# EAGLE board 2DROPLETS.V1_LPG(eurorack) (EAGLE 9.6.2)
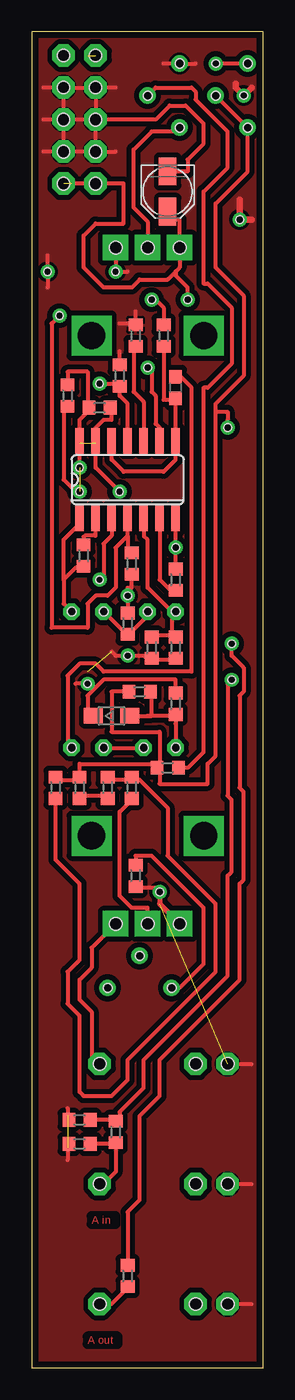
[diagram p0: board, top side]
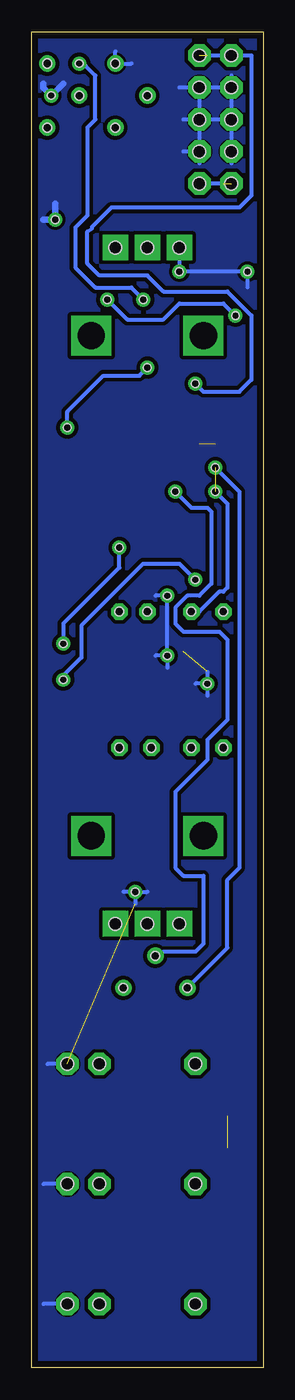
[diagram p1: board, bottom side, seen from below]

Size 18.39 x 106.05 mm. Coordinates in mm from the lower left corner, seen from the top.
Outline: 0,0 18.39,0 18.39,106.04 0,106.04 0,0
Copper layers (1*16): Top 0.035mm / dielectric 1.5mm / Bottom 0.035mm
Design rules "PCBCart-Standard *": minimum track width 8mil, minimum drill 0.4mm, track to track 8mil, track to pad 8mil, pad to pad 8mil, via to via 8mil, smd to smd 8mil, copper to edge 20mil, drill to drill 8mil, minimum pad ring 8mil, minimum via ring 10mil, stop-mask expansion 3mil, vias tented up to drill 25mil, thermal gap 8mil
Holes 0.7 mm at 11.75,103.51 9.21,100.97 11.75,98.43 17.14,98.43 14.61,100.97 17.14,103.51 3.18,60.01 5.71,60.01 9.21,60.01 11.43,60.01 3.18,49.21 5.71,49.21 8.89,49.21 11.43,49.21 6.03,30.16 8.57,32.7 11.11,30.16
Holes 1 mm at 5.4,5.08 15.56,5.08 13.02,5.08 13.02,14.6 15.56,14.6 15.56,24.13 13.02,24.13 5.4,24.13 5.4,14.6 9.21,35.24 6.67,35.24 11.75,35.24 6.67,88.9 9.21,88.9 11.75,88.9 2.54,104.14 2.54,101.6 2.54,99.06 2.54,96.52 2.54,93.98 5.08,93.98 5.08,96.52 5.08,99.06 5.08,101.6 5.08,104.14
Holes 0.6 mm at 4.45,54.29 7.62,56.52 11.43,65.09 15.88,57.47 15.88,54.61 5.4,62.55 7.62,61.28 2.22,83.5 12.38,84.77 5.4,78.11 9.21,79.38 15.56,74.61 1.27,87 6.67,87 10.16,37.78 14.61,103.51 9.52,84.77 3.81,69.53 3.81,71.44 6.98,69.53 16.51,91.12 16.83,100.97

## Footprints (pad centres in the part's own frame; a part is rotated, then mirrored left to right if it is on the bottom)
PANASONIC_B = smd 2.2 x 1.4: + 1.6,0; - -1.6,0
C0603 = smd 1.1 x 1: 1 -0.85,0; 2 0.85,0
SOD323-W = smd 1.5 x 1.2: A 1.45,0; C -1.45,0
R0603 = smd 1 x 1.1: 1 -0.85,0; 2 0.85,0
SO14 = smd 0.66 x 2.032: 1 -3.81,-3.073; 2 -2.54,-3.073; 3 -1.27,-3.073; 4 0,-3.073; 5 1.27,-3.073; 6 2.54,-3.073; 7 3.81,-3.073; 8 3.81,3.073; 9 2.54,3.073; 10 1.27,3.073; 11 0,3.073; 12 -1.27,3.073; 13 -2.54,3.073; 14 -3.81,3.073

## Placement (x,y rotation side)
C1  4.7u  [PANASONIC_B]  10.8,93.34 270 top
C27  47p  [C0603]  11.43,77.79 270 top
D5  1N4148  [SOD323-W]  6.35,51.75 0 top
R1  1.0k  [R0603]  8.57,53.66 0 top
R2  1.0k  [R0603]  3.81,46.04 90 top
R3  1.0k  [R0603]  1.91,46.04 90 top
R4  1.0k  [R0603]  10.8,47.62 180 top
R5  1.0k  [R0603]  5.4,76.2 0 top
R6  1.0k  [R0603]  7.94,63.82 90 top
R7  100k  [R0603]  7.62,59.05 270 top
R8  1.0k  [R0603]  8.25,81.92 270 top
R9  1.0k  [R0603]  6.98,78.74 90 top
R10  1.0k  [R0603]  7.94,46.04 90 top
R11  1.0k  [R0603]  6.03,46.04 90 top
R12  1.0k  [R0603]  3.81,19.69 180 top
R13  1.0k  [R0603]  8.25,39.05 270 top
R14  1.0k  [R0603]  6.67,18.73 90 top
R15  1.0k  [R0603]  3.81,17.78 180 top
R16  1.0k  [R0603]  2.86,77.15 90 top
R17  1.0k  [R0603]  10.48,81.92 90 top
R41  1.0k  [R0603]  4.13,64.45 270 top
R42  100k  [R0603]  11.43,62.55 270 top
R43  33k  [R0603]  7.62,7.3 270 top
R44  39k  [R0603]  11.43,57.15 90 top
R45  100k  [R0603]  9.52,57.15 270 top
R46  1.0k  [R0603]  11.43,52.7 270 top
TL074  TL074D  [SO14]  7.62,70.48 0 top

## Library data of the parts
C1 C27 R1-R17 R41-R46 = rcl
D5 = diode
TL074 = gm-ics

## Nets
GND: R8.1
S$2: R41.1
S$77: TL074.3
S$78: TL074.5
S$120: R41.2

## Tracks (layer width: path | path; a pad name or v marks a point on that pad's centre or on a via)
+12V  (via drill 0.6)
  Top 0.305: 7.94,64.77 7.62,65.09 7.62,66.04 | 7.62,66.04 7.62,66.99 | 7.62,66.04 6.67,65.09 6.67,61.91 6.03,61.28 5.08,61.28 4.45,60.64 4.45,58.74 1.59,58.74 1.59,82.87 v2.22,83.5
+12V1  (via drill 0.6)
  Bottom 0.305: 9.52,85.09 9.84,85.09 10.48,85.73 13.34,85.73 14.92,87.31 14.92,90.49 13.97,91.44 13.97,98.43 13.34,99.06 13.34,102.55 14.13,103.35 14.45,103.35 v14.61,103.51
+12V2  (via drill 0.6)
  Top 0.305: v9.52,84.77 9.84,84.77 10.48,84.14
-12V  (via drill 0.6)
  Top 0.305: 7.62,73.66 7.62,76.52 6.98,77.15 6.98,78.1 v5.4,78.1 5.08,78.1
  Bottom 0.305: v5.4,78.1 4.76,77.47 1.91,77.47 0.95,78.42 0.95,83.5 2.86,85.41 7.94,85.41 9.21,86.68 13.02,86.68 13.97,87.63 13.97,90.17 13.6,90.41 13.6,90.54 12.07,92.07 1.91,92.07 0.95,93.03 0.95,104.14 1.91,104.14
AUDIO_IN  (via drill 1 pad 1.78)
  other vias: 5.4,14.6
AUDIO_OUT  (via drill 1 pad 1.78)
  other vias: 5.4,5.08
CV_IN_(CATOFF)  (via drill 1 pad 1.78)
  other vias: 5.4,24.13
EXIT1  (via drill 0.6)
  Top 0.305: v9.21,79.37 9.52,79.06 9.52,77.47 9.84,77.15 9.84,74.93 10.16,74.61 10.16,73.66
  Bottom 0.305: v9.21,79.37 9.84,78.74 12.7,78.74 15.56,75.88 v15.56,74.61
EXIT2  (via drill 0.6)
  Top 0.305: 11.43,63.5 v11.43,65.09 11.43,66.99
  Bottom 0.305: v15.88,57.47 15.88,59.06 11.43,63.5 v11.43,65.09
EXIT3  (via drill 0.6)
  Top 0.305: 6.98,19.69 6.98,20.32 8.89,22.23 8.89,24.45 15.56,31.12 15.56,39.05 15.88,39.37 15.88,45.09 15.56,45.4 15.56,54.29 v15.88,54.61
GND  (via drill 0.6, 0.7 pad 1.3, 1 pad 1.78)  (3 unrouted)
  Top 0.305: 6.98,82.87 8.15,82.87 R8.1 8.25,83.82 | v2.54,101.6 v5.08,101.6 | v5.08,101.6 v5.08,99.06 | v2.54,101.6 0.95,101.6 | 6.67,101.6 v5.08,101.6 | v2.54,99.06 0.95,99.06 | v2.54,99.06 v2.54,101.6 | v5.08,99.06 v2.54,99.06 | v5.08,96.52 v2.54,96.52 | v2.54,96.52 v2.54,99.06 | v5.08,96.52 v5.08,99.06 | v5.08,96.52 6.67,96.52 | v2.54,96.52 0.95,96.52 | 13.02,103.51 v11.75,103.51 10.48,103.51 | 1.27,88.26 v1.27,86.99 1.27,85.73 | v6.67,86.99 7.62,86.99 | 6.98,79.37 6.98,80.65 | 7.94,62.86 7.94,61.91 7.62,61.91 v7.62,61.28 | 9.21,56.2 8.89,56.52 v7.62,56.52 6.67,56.52 6.35,56.83 | v4.45,54.29 3.49,54.29 | v10.16,37.78 9.84,38.1 8.25,38.1 | v15.56,24.13 17.46,24.13 | v15.56,5.08 17.46,5.08 | 2.86,20.64 2.86,20 | v15.56,14.6 17.46,14.6 | 2.86,17.46 2.86,16.51
  Top 0.508: 16.19,101.92 16.19,101.6 v16.83,100.96 17.46,101.6 | 16.51,92.71 v16.51,91.12 17.46,91.12
  Bottom 0.305: v6.67,86.99 v1.27,86.99 1.27,85.73 | 10.48,103.51 v11.75,103.51 11.75,104.46 | v2.54,101.6 2.54,97.15 | v5.08,101.6 5.08,97.15 | v2.54,99.06 6.35,99.06 | v2.54,101.6 6.67,101.6 | v2.54,96.52 2.54,95.57 | 5.08,95.57 v5.08,96.52 6.35,96.52 | v2.54,101.6 2.54,102.55 | 8.57,61.28 v7.62,61.28 v7.62,56.52 | v7.62,56.52 8.57,56.52 | v7.62,56.52 7.62,55.56 | 4.45,55.24 v4.45,54.29 | v4.45,54.29 5.4,54.29 | v4.45,54.29 4.45,53.34 | v10.16,37.78 10.16,36.83 | v10.16,37.78 11.11,37.78 | v10.16,37.78 9.21,37.78 | v15.56,5.08 17.46,5.08 | v15.56,24.13 17.14,24.13 | v15.56,14.6 17.46,14.6
  Bottom 0.508: 15.88,101.92 v16.83,100.96 17.46,101.6 17.46,101.92 | 16.51,92.39 v16.51,91.12 17.46,91.12
  pour Top (isolate 0.406): 0,106.05 18.41,106.05 18.41,0 0,0
  pour Top (isolate 0.406): 0,106.05 0,0 18.41,0 18.41,106.05
  pour Bottom (isolate 0.305): 0,106.05 18.41,106.05 18.41,0 0,0
RES  (via drill 0.6)  (2 unrouted)
  Top 0.305: 5.08,73.34 5.08,71.44 v6.98,69.53 | v3.81,71.44 3.81,73.34
  Bottom 0.305: v6.98,69.53 5.71,68.26 4.45,68.26 4.13,67.95 4.13,62.23 5.08,61.28 6.03,61.28 6.98,60.32 6.98,59.06 6.35,58.42 3.49,58.42 2.86,57.78 2.86,51.43 4.45,49.85 4.45,48.26 6.98,45.72 6.98,39.69 6.35,39.05 4.76,39.05 4.76,33.65 5.4,33.02 7.94,33.02 8.25,32.7 | v3.81,69.53 2.86,68.58 2.86,61.91 3.18,61.6 3.49,61.6 5.08,60.01 | v3.81,71.44 1.91,69.53 1.91,39.69 2.86,38.74 2.86,33.34 5.71,30.48 5.71,30.16
S$2
  Top 0.305: R41.1 4.13,65.4
S$3
  Top 0.305: 5.08,66.36 5.08,66.04 4.23,66.04 4.13,65.94 4.13,65.09
S$4  (via drill 0.7 pad 1.3)
  other vias: 14.61,100.97
S$5  (via drill 1 pad 1.78)  (1 unrouted)
  Bottom 0.305: v2.54,104.14 4.45,104.14
  other vias: 5.08,104.14
S$6  (via drill 1 pad 1.78)
  other vias: 5.08,93.98
S$7  (via drill 0.7 pad 1.3)
  Top 0.305: v17.14,103.51 14.92,103.51
S$8  (via drill 0.6)
  other vias: 5.4,62.55
S$9  (via drill 0.7 pad 1.3)
  other vias: 9.21,60.01
S$10  (via drill 0.7 pad 1.3)
  other vias: 3.18,49.21
S$11
  Top 0.305: 7.62,60.96 7.62,60.01
S$12
  Top 0.305: 14.61,36.83 14.61,31.43 7.62,24.45 7.62,22.86 6.35,21.59 4.13,21.59 3.81,21.91 3.81,27.94 2.86,28.89 2.86,31.43 3.81,32.39 3.81,38.42 1.91,40.32 1.91,45.09
S$14
  Top 0.305: 10.16,66.99 10.16,62.55 11.11,61.6
S$15
  Top 0.305: 9.52,56.2 11.43,56.2
S$16  (via drill 0.7 pad 1.3)
  Top 0.305: 14.92,100.96 14.92,100.65 15.88,99.7 | v17.14,98.43 15.88,99.7 | 15.88,99.7
S$17
  Top 0.305: 10.8,94.93 12.38,94.93 12.38,95.89 13.65,97.15 13.65,98.74 12.22,100.17 10.95,100.17 9.84,99.06 6.03,99.06
S$18
  Top 0.305: 11.43,73.66 11.43,76.52
S$19
  Top 0.305: 11.43,78.74 11.75,78.74 12.7,77.79 12.7,55.24 5.71,55.24 5.08,55.88 3.81,55.88 2.86,54.93 2.86,49.21
S$20
  Top 0.305: 9.52,51.75 9.52,53.66
S$21  (via drill 1 pad 2.03)
  Top 0.406: v11.75,35.24 10.16,36.83 10.16,37.46
S$22
  Top 0.305: 11.43,53.66 11.43,54.61 5.71,54.61 4.45,53.34 4.45,51.75
S$23
  Top 0.305: 7.94,51.75 9.52,51.75
S$24
  Bottom 0.305: 15.88,54.93 14.45,56.36 14.45,58.9 9.52,63.82 6.67,63.82 5.71,62.86
S$25
  Top 0.305: 15.88,57.15 15.88,56.52 16.83,55.56 16.83,53.66 16.51,53.34 16.51,46.04 16.83,45.72 16.83,38.74 16.51,38.42
S$26
  Top 0.305: 11.43,73.34 11.43,72.07 10.48,71.12 7.3,71.12 6.35,72.07 6.35,73.34
S$27
  Top 0.305: 7.62,53.66 6.35,53.66 6.35,50.48 10.16,50.48 10.16,46.35 13.97,46.35 13.97,47.94 14.61,48.58 14.61,75.88 | 14.61,75.88 15.56,75.88 15.56,75.25 | 14.61,75.88 14.61,76.52 16.83,78.74 16.83,85.09 14.61,87.31 14.61,92.39 17.14,94.93 17.14,98.11
S$28  (via drill 0.7 pad 1.3)
  Top 0.305: 13.65,77.79 13.97,77.79 15.88,79.69 15.88,84.14 13.97,86.04 13.65,86.04 13.65,93.34 15.56,95.25 15.56,98.11 13.65,100.01 13.02,100.65 13.02,101.28 12.7,101.6 9.84,101.6 v9.21,100.96
S$29  (via drill 0.6, 1 pad 1.78, 1 pad 2.03)  (1 unrouted)
  Top 0.305: 3.18,93.98 7.3,93.98 7.3,90.81 5.08,90.81 4.13,89.85 4.13,87.31 5.71,85.73 7.94,85.73 8.57,86.36 10.8,86.36 11.43,86.99 | 11.43,86.99 11.75,87.31 v11.75,88.9 11.75,91.12 10.48,91.12 | 11.43,86.99 11.43,86.68 12.38,85.73 v12.38,84.77
  Bottom 0.305: v2.54,93.98 4.45,93.98 | v12.38,84.77 10.8,83.18 7.94,83.18 6.67,84.45 3.18,84.45 2.54,83.82
S$30  (via drill 1 pad 2.03)
  Top 0.305: v6.67,88.9 6.67,86.99
  Bottom 0.305: v6.67,88.9 6.67,87.31
S$31  (via drill 1 pad 2.03)
  other vias: 9.21,88.9
S$33  (via drill 1 pad 2.03)
  Top 0.305: v6.67,35.24 4.76,33.34 4.76,31.75 3.81,30.8 3.81,29.21 4.76,28.26 4.76,24.45
S$34  (via drill 1 pad 2.03)
  Top 0.305: 9.21,36.2 v9.21,35.24 9.21,36.51 7.94,36.51 6.98,37.46 6.98,44.13 7.94,45.09
S$35
  Top 0.305: 5.08,73.66 5.08,74.61 5.71,75.25 6.35,75.25 6.35,76.2
S$36
  Top 0.305: 3.81,73.66 3.81,75.25 4.45,75.88
S$37
  Top 0.305: 2.54,76.52 2.54,70.48 3.49,69.53
S$38
  Top 0.305: 4.45,76.2 4.45,79.06 2.86,79.06 2.86,77.79
S$39  (via drill 0.7 pad 1.3)
  other vias: 8.57,32.7
S$40  (via drill 1 pad 1.78)
  other vias: 13.02,24.13
S$41  (via drill 0.7 pad 1.3)
  other vias: 6.03,30.16
S$42  (via drill 0.7 pad 1.3)
  Top 0.305: v11.11,30.16 11.75,30.16 13.65,32.07 13.65,36.51 9.52,40.64 8.25,40.64 8.25,39.69
S$44
  Top 0.305: 10.48,84.14 10.48,82.55
S$45  (via drill 2.16 pad 2.29)
  other vias: 4.76,81.92
S$46  (via drill 2.16 pad 2.29)
  other vias: 13.65,81.92
S$48
  Top 0.305: 3.81,47.31 3.81,47.94 10.16,47.94
S$49
  Top 0.305: 13.65,51.75 13.65,48.89 12.38,47.63 11.75,47.63
S$50  (via drill 2.16 pad 2.29)
  other vias: 13.65,42.23
S$51
  Top 0.305: 8.1,81.04 8.1,77.47 8.89,76.68 8.89,73.34
S$52  (via drill 2.16 pad 2.29)
  other vias: 4.76,42.23
S$56
  Top 0.305: 13.65,50.8 13.65,77.79
S$57  (via drill 0.7 pad 1.3)
  other vias: 11.75,98.43
S$65
  Top 0.305: 2.22,46.67 3.49,46.67
S$74
  Top 0.305: 10.48,80.96 10.48,76.84 11.43,76.84
S$76
  Top 0.305: 11.43,98.11 9.52,98.11 8.1,96.68 8.1,92.07 9.21,90.96 9.21,89.54
S$77
  Top 0.305: TL074.3 6.35,66.04 5.71,65.4 5.71,62.55
S$78
  Top 0.305: TL074.5 8.94,67.36 8.94,65.99 9.21,65.72 9.21,61.91 11.11,60.01
S$85
  Top 0.305: 5.71,45.4 4.13,45.4
S$88
  Top 0.305: 6.35,46.67 8.57,46.67 10.8,44.45 10.8,40.64 14.61,36.83
S$90
  Top 0.305: 7.62,7.94 7.62,12.38 8.57,13.33 8.57,20 10.16,21.59 10.16,24.45 16.51,30.8 16.51,38.42
S$92
  Top 0.305: 7.62,6.35 6.35,5.08 6.03,5.08
S$97
  Top 0.305: 6.35,19.69 5.08,19.69
S$98
  Top 0.305: 6.03,14.92 6.67,15.56 6.67,17.78 4.76,17.78
S$115  (via drill 1 pad 1.78)
  other vias: 13.02,14.6
S$118  (via drill 1 pad 1.78)
  other vias: 13.02,5.08
S$120
  Top 0.305: 4.23,63.71 R41.2
VACTROL_A2/B1  (via drill 0.7 pad 1.3)
  Top 0.305: v5.71,49.21 v8.89,49.21
VACTROL_A4  (via drill 0.7 pad 1.3)
  Top 0.305: 9.37,59.85 7.62,58.1 v5.71,60.01
VACTROL_A_3  (via drill 0.7 pad 1.3)
  Top 0.305: 4.13,63.5 3.49,63.5 2.54,62.55 | 2.54,62.55 2.54,60.64 v3.18,60.01 | 2.54,62.55 2.54,65.72 3.81,66.99
VACTROL_B2  (via drill 0.7 pad 1.3)
  Top 0.305: v11.43,49.21 11.43,51.12 11.43,51.75 9.21,51.75
VACTROL_B4  (via drill 0.7 pad 1.3)
  Top 0.305: 11.11,60.32 v11.43,60.01 11.11,59.69 11.11,58.1 9.84,58.1

## Text on the board
Top: A in | A out